# Altium PCB Teeth_Radiology3.0_PCB.PcbDoc
Units mm, origin at the board's own origin, x right, y up, seen from the top; angles counter-clockwise.
Board outline 151.26 x 111.25 mm, 2 copper layers (Top Layer, Bottom Layer); 88 components, 108 nets, 390 pads, 0 vias.
Unrouted connection lines stored in the file: 233.
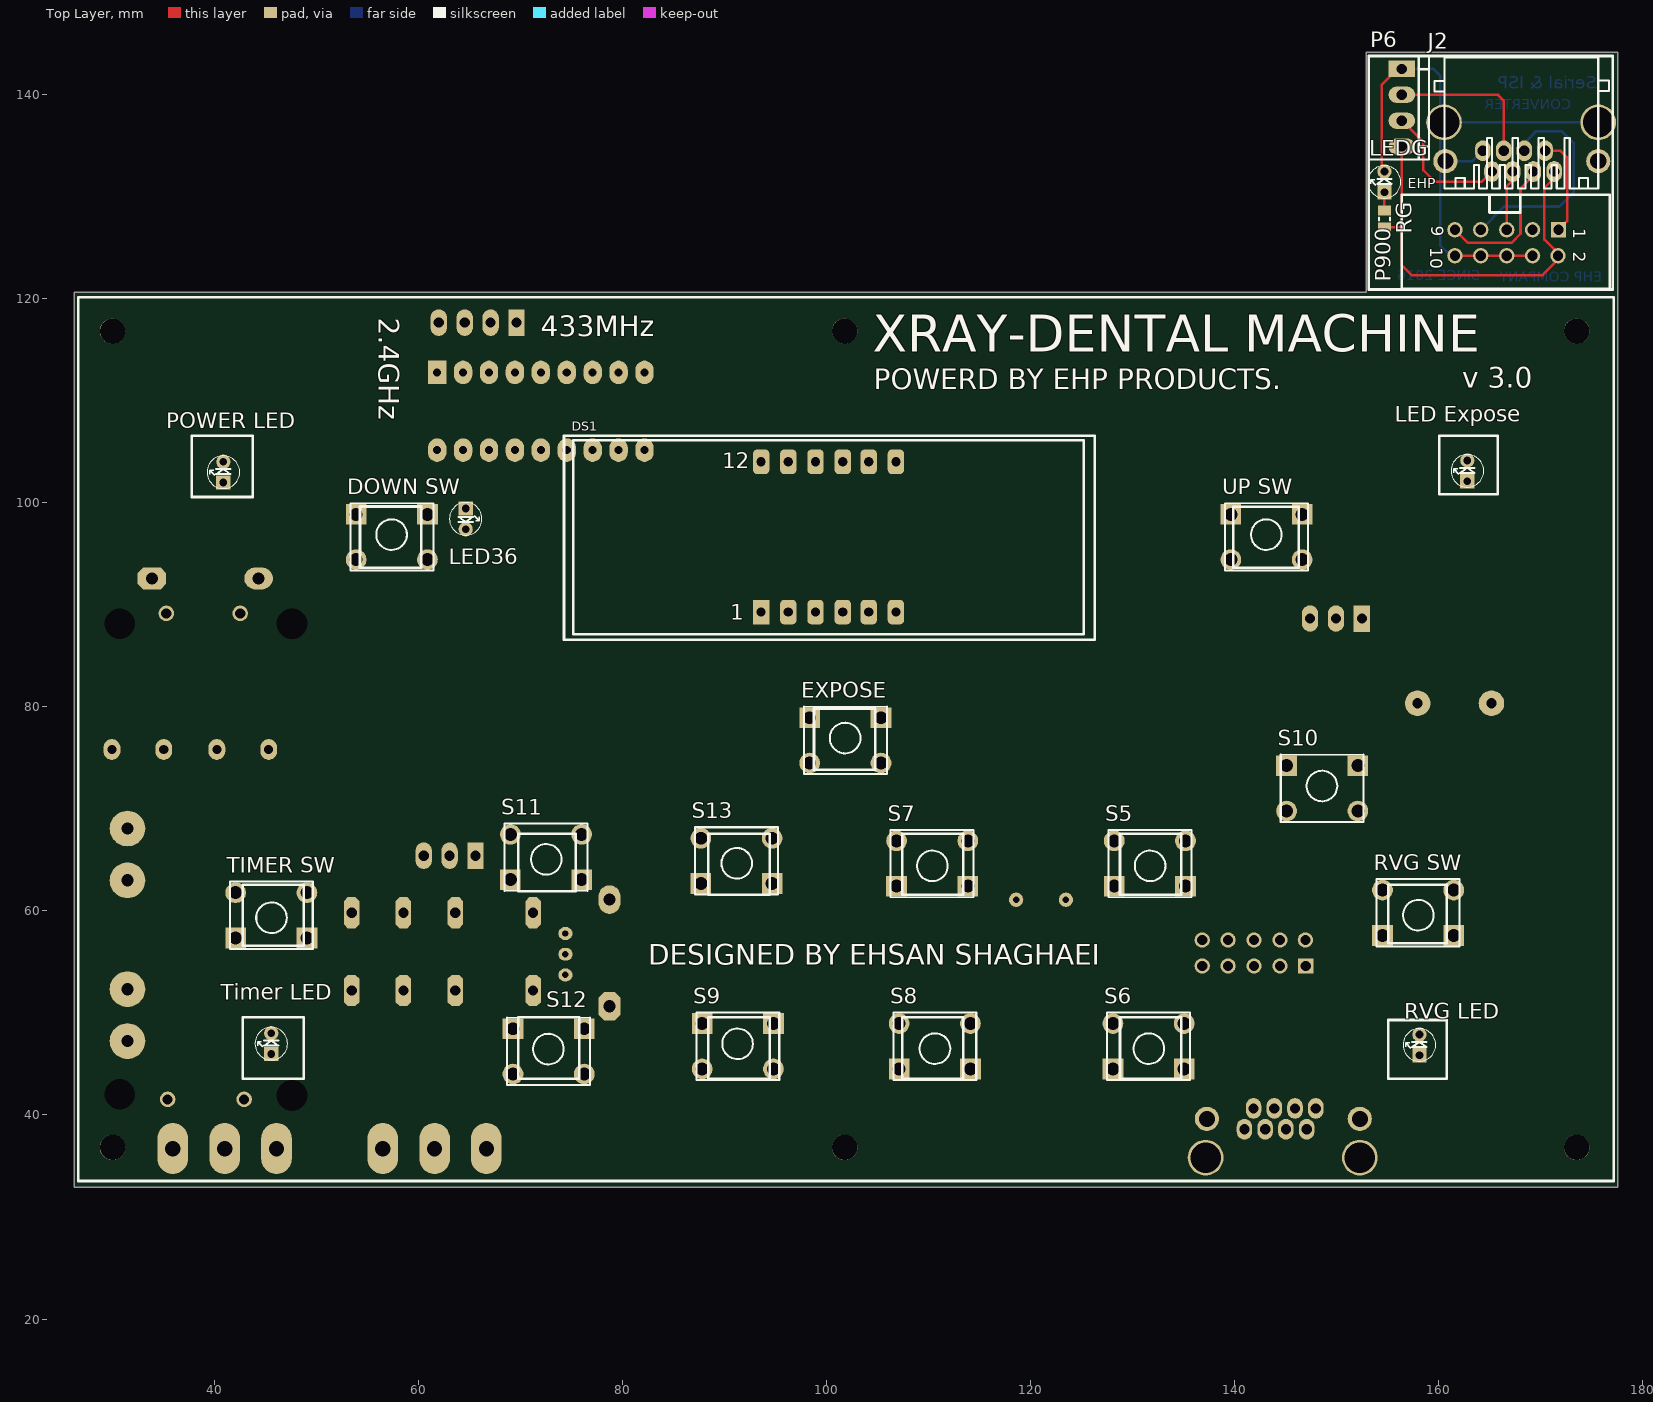
[diagram p0: Top Layer view]
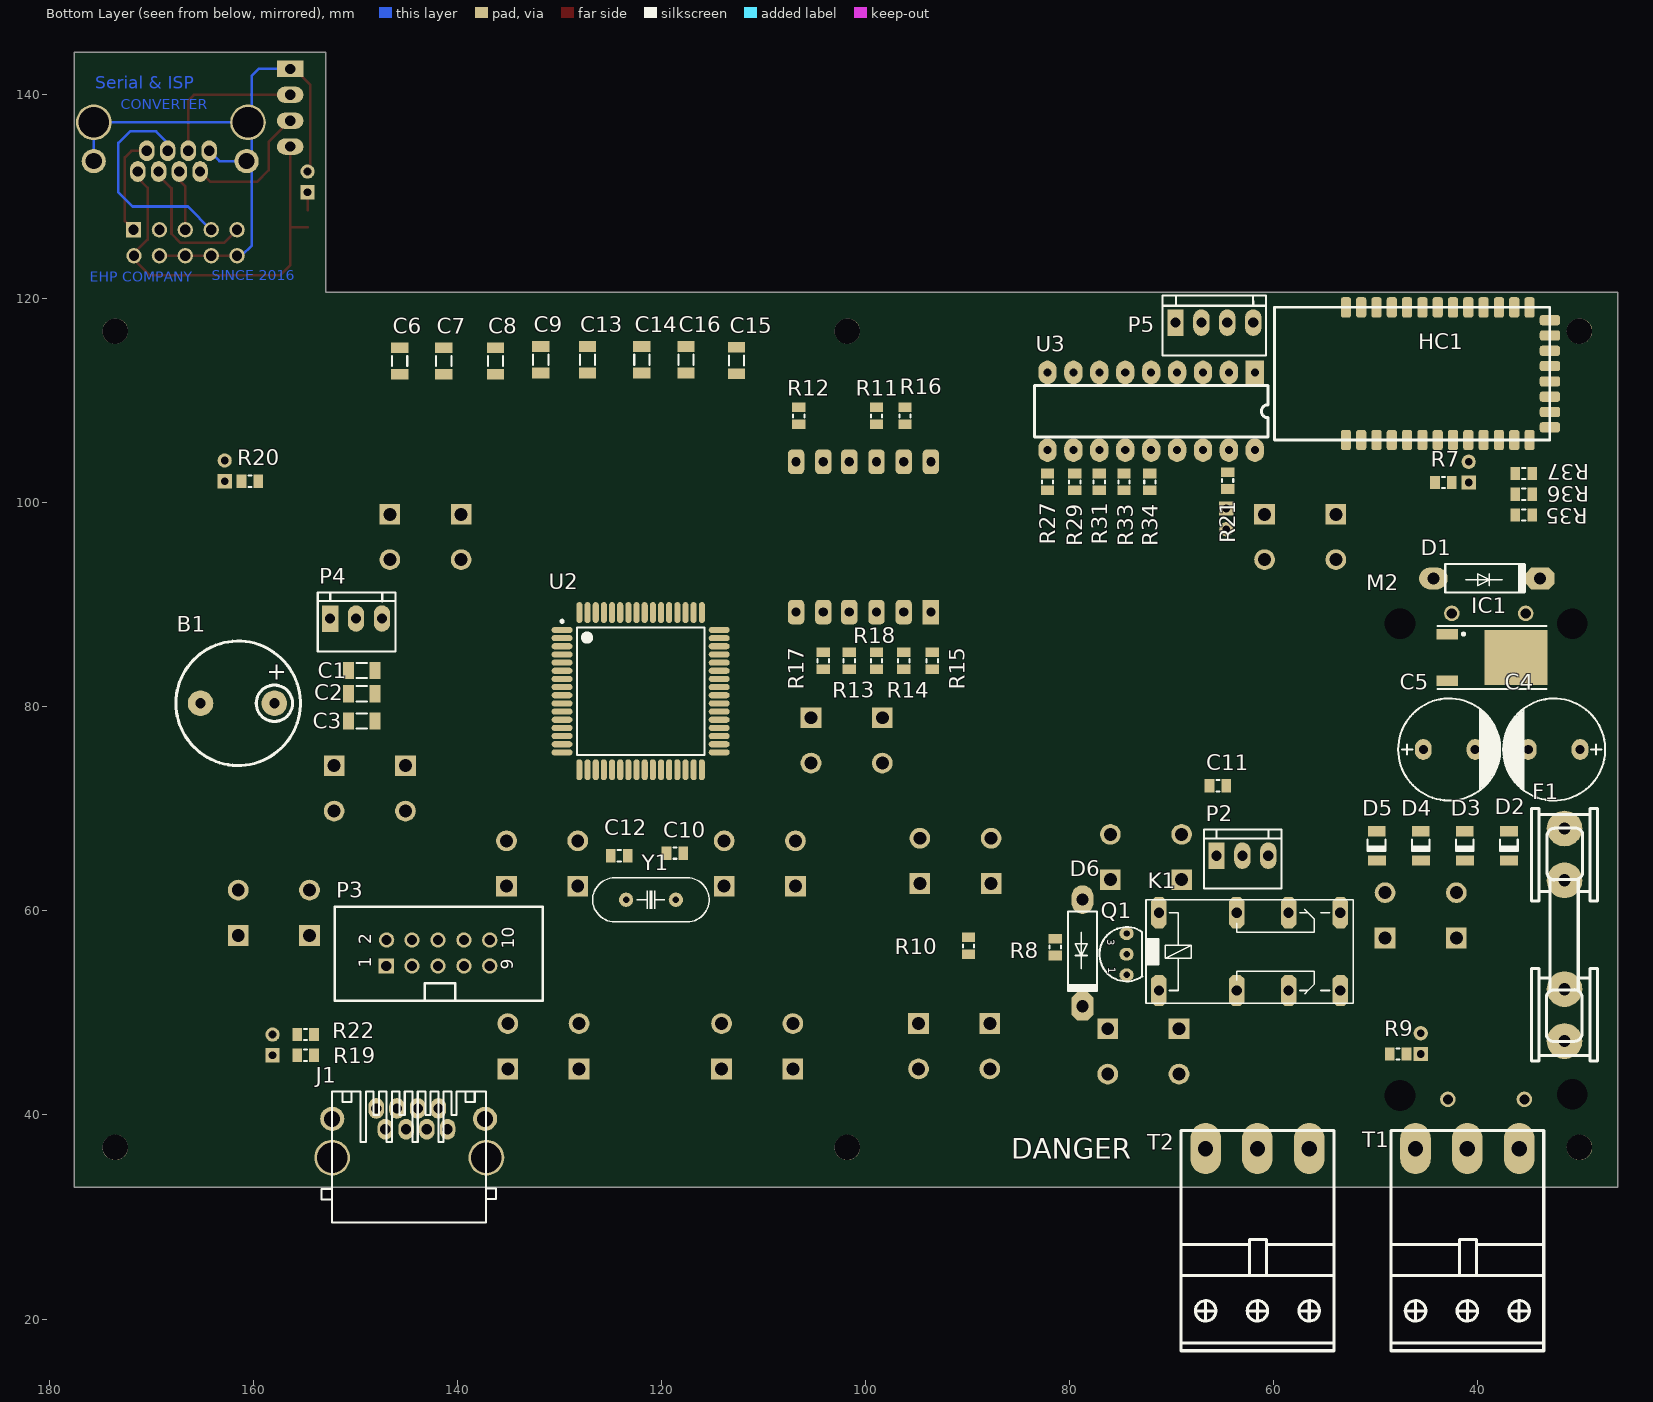
[diagram p1: Bottom Layer view, seen from below]

## Layer stack, top to bottom
Top Solder: solder mask 0.0102, Solder Resist, Dk 3.5
Top Layer: signal copper 0.0356
Dielectric 1: dielectric 0.32, FR-4, Dk 4.8
Bottom Layer: signal copper 0.0356
Bottom Solder: solder mask 0.0102, Solder Resist, Dk 3.5

## Board outline
26.289,32.893 177.546,32.893 177.546,144.145 152.908,144.145 152.908,120.65 26.289,120.65

## Design rules (kind name [scope] priority, off if disabled: settings)
Clearance [All] p1: gap=0.254
PolygonConnect [All] p1: connectstyle=Relief reliefconductorwidth=0.254 reliefentries=4 polygonreliefangle="90 Angle" airgapwidth=0.254
RoutingVias [All] p1: holewidth=0.711 width=1.27 viastyle="Through Hole" minholewidth=0.711 minwidth=1.27 maxholewidth=0.711 maxwidth=1.27
SolderMaskExpansion [All] p1: expansion=0.102
Width [All] p1: maxlimit=0.254 minlimit=0.254 preferedwidth=0.254
30 further rules are at their usual default settings.

## Components (designator, comment, footprint, x,y, rotation, side; value= is the part's Value field where it differs from the comment)
B1 "Buzzer" Buzzer 161.798,80.645 r180 bottom
C1 "10u" SMD_CAP_1206 148.082,83.566 r0 bottom
C2 "10u" SMD_CAP_1206 148.082,81.28 r0 bottom
C3 "100nF" SMD_CAP_1206 148.082,78.613 r0 bottom
C4 "1uF" "cap 04" 32.512,75.819 r180 bottom
C5 "1uF" "cap 04" 42.799,75.819 r0 bottom
C6 "10u" SMD_CAP_1206 145.669,115.189 r270 bottom
C7 "100nF" SMD_CAP_1206 141.351,115.189 r270 bottom
C8 "10u" SMD_CAP_1206 136.271,115.189 r270 bottom
C9 "100nF" SMD_CAP_1206 131.826,115.316 r270 bottom
C10 "18pF" SMD_CAP_0805 117.856,65.659 r0 bottom
C11 "100nF" SMD_CAP_0805 66.294,72.263 r180 bottom
C12 "18pF" SMD_CAP_0805 124.968,65.405 r180 bottom
C13 "10uF" SMD_CAP_1206 127.254,115.316 r270 bottom
C14 "10u" SMD_CAP_1206 121.92,115.316 r270 bottom
C15 "10u" SMD_CAP_1206 112.649,115.245 r270 bottom
C16 "100nF" SMD_CAP_1206 117.602,115.316 r270 bottom
D1 "1N4007" My_DO-41 33.665,92.837 r0 bottom
D2 "Diode Zener SMD" DIOMELF3615N 36.957,66.421 r90 bottom
D3 "Diode Zener SMD" DIOMELF3615N 41.275,66.421 r90 bottom
D4 "Diode Zener SMD" DIOMELF3615N 45.593,66.421 r90 bottom
D5 "Diode Zener SMD" DIOMELF3615N 49.911,66.421 r90 bottom
D6 "1N4007" My_DO-41 78.486,50.419 r90 bottom
"DOWN SW" "Switch PB" "Switch - Push to On" 57.404,96.647 r0 top
DS1 "7Segment-4Digit-CA" 7segCA 75.184,87.122 r0 top
EXPOSE "Switch PB" "Switch - Push to On" 101.854,76.708 r0 top
F1 "FUSE" FUSE_1 31.496,52.324 r90 bottom
HC1 "HC-05 Bluetooth" HC-05 42.926,112.649 r90 bottom
IC1 "L78M05" TO-252 39.624,84.836 r270 bottom
J1 "RJ45" My_RJ45 144.78,32.258 r180 bottom
J2 "RJ45" My_RJ45 168.148,140.843 r180 top
K1 "Relay-DPDT" My_REL_cochick 67.437,56.007 r180 bottom
LED36 "Red" LED-3mm 64.643,98.425 r270 top
"LED Expose" "Red" LED-3mm 162.814,103.124 r90 top
LEDG "Red" LED-3mm 154.686,131.445 r90 top
M2 "220-12 Medule" "AC-DC 220-12" 27.305,39.497 r90 bottom
P2 "LHWR" "Polarized Header 3" 63.119,65.532 r180 bottom
P3 "BoxHeader 2x5" "Box Header 2x5" 139.319,54.61 r90 bottom
P4 "LHWR" "Polarized Header 3" 149.987,88.773 r180 bottom
P5 "LHWR" "Polarized Header 4" 65.786,117.856 r180 bottom
P6 "LHWR" "Polarized Header 4" 156.591,138.684 r270 top
P900 "BoxHeader 2x5" "Box Header 2x5" 164.084,126.746 r270 top
"POWER LED" "Red" LED-3mm 40.894,102.997 r90 top
Q1 "C945" C945 74.422,55.753 r270 bottom
R7 "330" "RES 0805 (2012X06L)" 44.196,101.981 r180 bottom
R8 "1K" "RES 0805 (2012X06L)" 81.407,55.626 r90 bottom
R9 "330" "RES 0805 (2012X06L)" 48.641,45.974 r180 bottom
R10 "330" "RES 0805 (2012X06L)" 89.916,55.753 r90 bottom
R11 "330" "RES 0805 (2012X06L)" 96.139,107.696 r90 bottom
R12 "330" "RES 0805 (2012X06L)" 106.553,109.346 r270 bottom
R13 "330" "RES 0805 (2012X06L)" 101.6,83.693 r90 bottom
R14 "330" "RES 0805 (2012X06L)" 96.266,83.693 r90 bottom
R15 "330" "RES 0805 (2012X06L)" 93.472,83.693 r90 bottom
R16 "330" "RES 0805 (2012X06L)" 98.933,107.696 r90 bottom
R17 "330" "RES 0805 (2012X06L)" 104.14,83.693 r90 bottom
R18 "330" "RES 0805 (2012X06L)" 98.933,83.693 r90 bottom
R19 "10K" "RES 0805 (2012X06L)" 154.052,45.847 r0 bottom
R20 "330" "RES 0805 (2012X06L)" 159.512,102.108 r0 bottom
R21 "330" "RES 0805 (2012X06L)" 64.516,102.997 r270 bottom
R22 "330" "RES 0805 (2012X06L)" 154.051,47.879 r0 bottom
R27 "1K" "RES 0805 (2012X06L)" 82.169,102.87 r270 bottom
R29 "1K" "RES 0805 (2012X06L)" 79.502,102.87 r270 bottom
R31 "1K" "RES 0805 (2012X06L)" 77.089,102.87 r270 bottom
R33 "1K" "RES 0805 (2012X06L)" 74.676,102.87 r270 bottom
R34 "820k" "RES 0805 (2012X06L)" 72.136,101.219 r90 bottom
R35 "51k" "RES 0805 (2012X06L)" 36.322,98.806 r180 bottom
R36 "100k" "RES 0805 (2012X06L)" 34.671,100.838 r0 bottom
R37 "100k" "RES 0805 (2012X06L)" 34.671,102.87 r0 bottom
RG "330" "RES 0805 (2012X06L)" 154.686,127 r90 top
"RVG LED" "Red" LED-3mm 158.115,46.863 r90 top
"RVG SW" "Switch PB" "Switch - Push to On" 157.988,59.817 r180 top
S5 "Switch PB" "Switch - Push to On" 131.699,64.643 r180 top
S6 "Switch PB" "Switch - Push to On" 131.572,46.736 r180 top
S7 "Switch PB" "Switch - Push to On" 110.363,64.643 r180 top
S8 "Switch PB" "Switch - Push to On" 110.617,46.736 r180 top
S9 "Switch PB" "Switch - Push to On" 91.313,46.736 r0 top
S10 "Switch PB" "Switch - Push to On" 148.59,72.009 r0 top
S11 "Switch PB" "Switch - Push to On" 72.517,65.278 r180 top
S12 "Switch PB" "Switch - Push to On" 72.771,46.228 r0 top
S13 "Switch PB" "Switch - Push to On" 91.186,64.897 r180 top
T1 "PHONIX3" PHONIX3 35.941,36.703 r0 bottom
T2 "PHONIX3" PHONIX3 56.515,36.703 r0 bottom
"Timer LED" "Red" LED-3mm 45.593,46.99 r90 top (schematic designator Timer)
"TIMER SW" "Switch PB" "Switch - Push to On" 45.593,59.563 r180 top
U2 "ATmega64A-AU" 64A_M 122.047,81.534 r180 bottom
U3 "PT2272" DIP18 61.849,112.776 r270 bottom
"UP SW" "Switch PB" "Switch - Push to On" 143.129,96.647 r0 top
Y1 "16MHz" "XTAL Small" 121.031,61.087 r0 bottom

## Footprints (in the part's own frame and the unit in brackets; to place one, negate y for a bottom-side part, rotate by r counter-clockwise, add the part's x,y. Pads: shape width x height; smd on the part's side, far side on the other; paste and mask are expansions set on the pad)
7segCA [mm] "7seg-CA; 12 Leads"
  rect 1.6x2.4 hole 0.9: 1(18.415,2.159)
  rrect50% 1.6x2.4 hole 0.9: 2(21.082,2.159) 3(23.749,2.159) 4(26.416,2.159) 5(28.956,2.159) 6(31.623,2.159) 7(31.623,16.891) 8(28.956,16.891) 9(26.416,16.891) 10(23.749,16.891) 11(21.082,16.891) 12(18.415,16.891)
  silkscreen extent 0,0 50.04,19
64A_M [mm] "Thin QFP, 64-Leads, Body 14x14mm, Pitch 0.8mm, IPC Low Density"
  oval 2.05x0.6 smd: 1(-7.7,6) 2(-7.7,5.2) 3(-7.7,4.4) 4(-7.7,3.6) 5(-7.7,2.8) 6(-7.7,2) 7(-7.7,1.2) 8(-7.7,0.4) 9(-7.7,-0.4) 10(-7.7,-1.2) 11(-7.7,-2) 12(-7.7,-2.8) 13(-7.7,-3.6) 14(-7.7,-4.4) 15(-7.7,-5.2) 16(-7.7,-6) 33(7.7,-6) 34(7.7,-5.2) 35(7.7,-4.4) 36(7.7,-3.6) 37(7.7,-2.8) 38(7.7,-2) 39(7.7,-1.2) 40(7.7,-0.4) 41(7.7,0.4) 42(7.7,1.2) 43(7.7,2) 44(7.7,2.8) 45(7.7,3.6) 46(7.7,4.4) 47(7.7,5.2) 48(7.7,6)
  oval 0.6x2.05 smd: 17(-6,-7.7) 18(-5.2,-7.7) 19(-4.4,-7.7) 20(-3.6,-7.7) 21(-2.8,-7.7) 22(-2,-7.7) 23(-1.2,-7.7) 24(-0.4,-7.7) 25(0.4,-7.7) 26(1.2,-7.7) 27(2,-7.7) 28(2.8,-7.7) 29(3.6,-7.7) 30(4.4,-7.7) 31(5.2,-7.7) 32(6,-7.7) 49(6,7.7) 50(5.2,7.7) 51(4.4,7.7) 52(3.6,7.7) 53(2.8,7.7) 54(2,7.7) 55(1.2,7.7) 56(0.4,7.7) 57(-0.4,7.7) 58(-1.2,7.7) 59(-2,7.7) 60(-2.8,7.7) 61(-3.6,7.7) 62(-4.4,7.7) 63(-5.2,7.7) 64(-6,7.7)
  silkscreen extent -7.83,-6.25 6.25,6.97, body extent -7,-7 7,7, height 1.2
"AC-DC 220-12" [mil]
  round 60 hole 39.37: 0(1955,600) 1(1955,315) 2(80,615) 3(80,320)
  round 60 hole 118.11: 4(1915,135) 5(1915,800) 6(95,800) 7(100,135)
  body extent 6,-5 2014,940, height 118
"Box Header 2x5" [mm]
  rect 1.5x1.5 hole 1: 1(-0.006,7.666)
  round 1.5 hole 1: 2(2.54,7.62) 3(-0.006,5.126) 4(2.534,5.126) 5(-0.006,2.586) 6(2.534,2.586) 7(-0.006,0.046) 8(2.534,0.046) 9(-0.006,-2.494) 10(2.534,-2.494)
  silkscreen extent -3.42,-7.7 5.8,12.7, body extent -3.4,-7.7 5.7,12.66, height 9.43
Buzzer [mm] "Magnetic Transducer"
  round 2.5 hole 1: 1(3.859,-0.297) 2(-3.38,-0.297)
  silkscreen extent -5.8,-6.4 6.4,5.8, body extent -5.67,-6.39 6.17,5.45, height 6.98
C945 [mil] "NPN Transistor"
  oval 50x55 hole 25: 1(80,0) 2(0,0) 3(-80,0)
  silkscreen extent -105,-105 105,61, body extent -94,-96 95,58, height 315
"cap 04" [mil]
  oval 65x80 hole 35: 1(100,0) 2(-100,0)
  silkscreen extent -197,-197 197,197, body extent -198,-197 198,199, height 513
DIOMELF3615N [mm] "MELF Diode, 2-Leads, Body 3.6x1.5mm, IPC Medium Density"
  rect 1x1.75 smd: 1(-1.495,-0.03) 2(1.38,-0.005)
  silkscreen extent -0.55,-0.87 0.55,0.87, body extent -1.61,-0.83 1.54,0.67, height 1.45
DIP18 [mm]
  rect 2.3x1.8 hole 0.8: 1(0,0)
  oval 2.3x1.8 hole 0.8: 2(0,-2.54) 3(0,-5.08) 4(0,-7.62) 5(0,-10.16) 6(0,-12.7) 7(0,-15.24) 8(0,-17.78) 9(0,-20.32) 10(7.62,-20.32) 11(7.62,-17.78) 12(7.62,-15.24) 13(7.62,-12.7) 14(7.62,-10.16) 15(7.62,-7.62) 16(7.62,-5.08) 17(7.62,-2.54) 18(7.62,0)
  silkscreen extent 1.27,-21.59 6.35,1.27
FUSE_1 [mm]
  round 3.5 hole 1.2: 1(0,0) 2(10.668,0) ""(-5.08,0) ""(15.748,0)
  silkscreen extent -7.04,-3.25 17.7,3.25
HC-05 [mm]
  rrect50% 2x1 smd: 1(-6.5,10) 2(-6.5,8.5) 3(-6.5,7) 4(-6.5,5.5) 5(-6.5,4) 6(-6.5,2.5) 7(-6.5,1) 8(-6.5,-0.5) 9(-6.5,-2) 10(-6.5,-3.5) 11(-6.5,-5) 12(-6.5,-6.5) 13(-6.5,-8) 22(6.5,-8) 23(6.5,-6.5) 24(6.5,-5) 25(6.5,-3.5) 26(6.5,-2) 27(6.5,-0.5) 28(6.5,1) 29(6.5,2.5) 30(6.5,4) 31(6.5,5.5) 32(6.5,7) 33(6.5,8.5) 34(6.5,10)
  rrect50% 1x2 smd: 14(-5.254,-10) 15(-3.754,-10) 16(-2.254,-10) 17(-0.754,-10) 18(0.746,-10) 19(2.246,-10) 20(3.746,-10) 21(5.246,-10)
  silkscreen extent -6.5,-10 6.5,17, body extent -6.5,-9.77 6.5,17.13, height 2.5
LED-3mm [mil]
  rect 55x55 hole 30: 1(-40,0)
  round 55 hole 30: 2(40,0)
  silkscreen extent -63,-63 63,63, body extent -69,-69 69,69, height 154
My_DO-41 [mil]
  oval 110x85 hole 47.24: A(420.71,10)
  oct 110x85 hole 47.24: K(8.9,10)
  silkscreen extent 64,-45 375,65
My_REL_cochick [mil]
  oct 60x120 hole 40: 1(-150,-150) 2(-150,150) O1(350,-150) O2(350,150) P1(150,-150) P2(150,150) S1(550,-150) S2(550,150)
  silkscreen extent -200,-200 600,200
My_RJ45 [mil]
  oval 60x80 hole 40: 1(150,250) 2(115,330) 3(70,250) 4(35,330) 5(-10,250) 6(-45,330) 7(-90,250) 8(-125,330)
  round 137.8 hole 118.11 unplated: shild(-295,140) shild(300,140)
  round 92.99 hole 62.01: shild(-295,290) shild(295,290)
  silkscreen extent -336,-110 336,395
PHONIX3 [mm]
  oval 3x5 hole 1.5: 1(0,0) 2(5.08,0) 3(10.16,0)
  silkscreen extent -2.41,-1.78 12.57,19.81
"Polarized Header 3" [mm]
  rect 1.6x2.6 hole 1: 1(-2.49,-0.12)
  oval 1.6x2.6 hole 1: 2(0.05,-0.12) 3(2.59,-0.12)
  silkscreen extent -3.7,-3.35 3.9,2.42, body extent -3.72,-3.35 3.9,2.45, height 10.75
"Polarized Header 4" [mm]
  rect 1.6x2.6 hole 1: 1(-3.84,-0.2)
  oval 1.6x2.6 hole 1: 2(-1.3,-0.2) 3(1.24,-0.2) 4(3.78,-0.2)
  silkscreen extent -5.1,-3.42 5.05,2.45, body extent -5.06,-3.43 5.1,2.37, height 10.75
"RES 0805 (2012X06L)" [mm] "Chip Resistor, 2-Leads, Body 2.0x1.3mm, IPC High Density _ (0.100 W)"
  rect 0.95x1.3 smd: 1(0,0) 2(1.65,0)
  silkscreen extent 0.67,-0.55 0.97,0.55, body extent -0.19,-0.63 1.84,0.64, height 0.6
SMD_CAP_0805 [mm]
  rect 0.95x1.3 smd: 1(0,0) 2(1.65,0)
  silkscreen extent 0.67,-0.55 0.97,0.55, body extent -0.19,-0.64 1.84,0.63, height 0.65
SMD_CAP_1206 [mm]
  rect 1.05x1.7 smd: 1(0,0) 2(2.596,0)
  silkscreen extent 0.8,-0.75 1.8,0.75, body extent -0.22,-0.77 2.82,0.75, height 0.75
"Switch - Push to On" [mil]
  rect 80x80 hole 50: 1(-137.5,87.5) 1(137.5,87.5)
  round 80 hole 50: 2(-137.5,-87.5) 2(137.5,-87.5)
  silkscreen extent -160,-130 160,130, body extent -155,-121 157,123, height 205
TO-252 [mm] "D-PAK/TO-252-AA; 3 Leads (1 Cropped); Body 10.1 (inc. leads) x 6.6 mm (LxW max)"
  rect 1x2.1 smd: 1(-2.285,-3.375) 3(2.285,-3.375)
  rect 5.4x6.2 smd: 4(0,3.375)
  silkscreen extent -3.08,-4.32 3.09,6.38, body extent -3.27,-4.11 3.27,5.83, height 2.39
"XTAL Small" [mil]
  round 55 hole 25: 1(-96.06,0) 2(96.06,0)
  silkscreen extent -225,-85 225,85, body extent -226,-89 226,89, height 140

## Part data
C1 C2 C3 C6 C7 C8 C9 C10 C11 C12 C13 C14 C15 C16: library part Cap-Bipolar, "Bipolar Capacitor"
C4 C5: library part Cap-Polar, "Polar Capacitor"
D1 D6: "1 Amp Diode"
"DOWN SW" EXPOSE "RVG SW" S5 S6 S7 S8 S9 S10 S11 S12 S13 "TIMER SW" "UP SW": "Push Button Switch"
DS1: library part 7Seg-4Digit-CA, "7-Segment Display: CA"
IC1: "Precision 500mA Regulator"
J1 J2: "Right Angle, Standard Profile, RJ45-Keyed, Flange Mount PCB Jack"
K1: "Dual-Pole Dual-Throw Relay"
LED36 "LED Expose" LEDG "POWER LED" "RVG LED" "Timer LED": library part LED, "LED"
P2 P4: library part "3pin LHWR"
P5 P6: library part "4pin LHWR"
Q1: "NPN Transistor"
R7 R8 R9 R10 R11 R12 R13 R14 R15 R16 R17 R18 R19 R20 R21 R22 R27 R29 R31 R33 R34 R35 R36 R37 RG: library part Resistor, "Resistor"
U2: "8-bit AVR Microcontroller, 64KB Flash, 2KB EEPROM, 4KB SRAM, 64-pin TQFP, Industrial Grade (-40°C to 85°C)"
Y1: library part XTAL, "XTAL Crystal"

## Free pads (board coordinates)
  round 2.5 hole 2.5: 1(30.032,36.818) 1(30.032,116.818) 1(101.782,36.818) 1(101.782,116.818) 1(173.532,36.818) 1(173.532,116.818)

## Nets (pads, with @x,y where several pads share a name; then routed paths per layer and width w, separated by ;. In a path a pad name is that pad's centre, name@x,y a point inside that pad or via, vN(x,y) a via of type N, cw(c..) or ccw(c..) an arc to the next point about the centre after c; other vN are vias at no path point)
+12: C4.1 C6.1 C7.1 D1.K IC1.1 P2.1 R8.2
A0: U2.51 U3.1
A1: U2.50 U3.2
A2: U2.49 U3.3
A3: U2.48 U3.4
A4: U2.47 U3.5
A5: U2.46 U3.6
A6: U2.45 U3.7
A7: U2.44 U3.8
AS: HC1.24 HC1.31 U2.5
D0: R33.1 U2.32 U3.13
D1: R31.1 U2.31 U3.12
D2: R29.1 U2.30 U3.11
D3: R27.1 U2.29 U3.10
EARTH: T1.2 T2.2
GND: "DOWN SW.2" "LED Expose.2" "POWER LED.2" "RVG SW.1" "Timer LED.2" "TIMER SW.1" "UP SW.1" B1.2 C1.2 C2.2 C3.2 C4.2 C5.2 C6.2 C7.2 C8.2 C9.2 C10.1 C11.1 C12.1 C13.2 C14.2 C15.2 C16.2 D2.2 D3.2 D4.2 D5.2 D6.A EXPOSE.2 HC1.13 HC1.21 HC1.22 IC1.4 J1.1 J1.shild LED36.2 M2.1 P3.4 P3.6 P3.8 P3.10 P4.1 P5.1 Q1.1 R22.1 R27.2 R29.2 R31.2 R33.2 R36.1 R37.1 S5.1 S6.2 S7.1 S8.2 S9.1 S10.2 S11.1 S12.1 S13.1 U2.22 U2.53 U2.63 U3.9
KEY: HC1.34 U2.4
L: F1.1 K1.S1 T1.1
MISO: HC1.2 J1.2 J1.6 P3.9 U2.3
MOSI: HC1.1 J1.3 J1.7 P3.1 U2.2
N: K1.S2 M2.3 T1.3
NetB1_1: B1.1 U2.10
NetC12_2: C12.2 U2.23 Y1.2
NetD1_A: D1.A M2.0
NetD6_K: D6.K K1.1 Q1.2 R8.1
"NetDOWN SW_1": "DOWN SW.1" U2.25
NetDS1_1: DS1.1 R15.2
NetDS1_2: DS1.2 R14.2
NetDS1_3: DS1.3 R18.2
NetDS1_4: DS1.4 R13.2
NetDS1_5: DS1.5 R17.2
NetDS1_6: DS1.6 U2.18
NetDS1_7: DS1.7 R12.2
NetDS1_8: DS1.8 U2.43
NetDS1_9: DS1.9 U2.34
NetDS1_10: DS1.10 R16.2
NetDS1_11: DS1.11 R11.2
NetDS1_12: DS1.12 U2.33
NetEXPOSE_1: EXPOSE.1 U2.27
NetF1_2: F1.2 M2.2
NetHC1_12: HC1.12 R35.1 R36.2 R37.2
NetJ2_1: J2.1 J2.shild LEDG.2 P6.1 P900.4 P900.6 P900.8 P900.10 | length 65.4
  Top Layer w0.254: LEDG.2 154.432,132.715 154.432,140.97 155.986,142.524 P6.1 ; J2.shild@160.147,132.969 J2.shild@160.655,133.477 ; P900.10@161.157,124.212 P900.10 P900.8 P900.6 P900.4
  Bottom Layer w0.254: P6.1 159.482,142.524 160.147,141.859 J2.shild@160.147,136.906 ; J2.shild@160.147,132.969 160.147,125.222 P900.10@161.157,124.212 ; J2.1 163.322,133.477 160.655,133.477 160.147,133.985 J2.shild@160.147,136.906 ; J2.shild@175.641,133.477 175.641,137.287 160.528,137.287 J2.shild@160.147,136.906
NetJ2_2: J2.2 P6.3 | length 13.4
  Top Layer w0.254: P6.3 158.496,135.339 158.496,132.588 159.639,131.445 164.211,131.445 J2.2
NetJ2_3: J2.3 P6.2 | length 15.2
  Top Layer w0.254: P6.2 165.832,139.984 166.37,139.446 J2.3
NetJ2_4: J2.4 P900.5 | length 6
  Top Layer w0.254: P900.5 166.67,130.983 167.259,131.572 J2.4
NetJ2_5: J2.5 P900.7 | length 22
  Bottom Layer w0.254: P900.7 166.41,129.032 171.831,129.032 173.228,130.429 173.228,135.255 172.085,136.398 169.545,136.398 168.402,135.255 J2.5
NetJ2_6: J2.6 P900.9 | length 13.9
  Top Layer w0.254: P900.9 162.866,125.476 167.132,125.476 168.021,126.365 168.021,130.81 169.291,132.08 J2.6
NetJ2_7: J2.7 P900.1 | length 9.9
  Top Layer w0.254: J2.7 171.958,134.493 172.593,133.858 172.593,127.595 P900.1
NetJ2_8: J2.8 P6.4 P900.2 RG.1 | length 39.5
  Top Layer w0.254: RG.1 156.391,127 ; P6.4 156.391,127 ; J2.8@171.577,132.461 J2.8 171.323,131.826 170.37,130.874 170.37,125.793 171.704,124.46 P900.2 171.704,123.825 170.18,122.301 157.353,122.301 156.391,123.263 156.391,127
NetJS1_2: 
NetJS2_2: 
NetJS3_2: 
NetJS4_2: 
NetJS5_2: 
NetJS6_2: 
NetJS7_2: 
NetJS8_2: 
NetK1_2: K1.2 P2.2
NetK1_P1: K1.P1 T2.3
NetK1_P2: K1.P2 T2.1
NetLED36_1: LED36.1 R21.2
"NetLED Expose_1": "LED Expose.1" R20.2
NetLEDG_1: LEDG.1 RG.2 | length 1.8
  Top Layer w0.254: RG.2 LEDG.1
NetM1_2: 
NetP1_1: 
NetP5_3: P5.3 U3.14
"NetPOWER LED_1": "POWER LED.1" R7.2
NetQ1_3: Q1.3 R10.2
NetR1_1: 
NetR1_2: 
NetR3_2: 
NetR4_2: 
NetR5_2: 
NetR6_2: 
NetR9_2: "Timer LED.1" R9.2
NetR10_1: R10.1 U2.12
NetR11_1: R11.1 U2.54
NetR12_1: R12.1 U2.55
NetR13_1: R13.1 U2.56
NetR14_1: R14.1 U2.57
NetR15_1: R15.1 U2.58
NetR16_1: R16.1 U2.59
NetR17_1: R17.1 U2.60
NetR18_1: R18.1 U2.61
NetR20_1: R20.1 U2.19
NetR21_1: R21.1 U3.17
NetR22_2: "RVG LED.2" R22.2
NetR34_1: R34.1 U3.16
NetR34_2: R34.2 U3.15
"NetRVG LED_1": "RVG LED.1" U2.35
"NetRVG SW_2": "RVG SW.2" U2.8
NetS5_2: S5.2 U2.38
NetS6_1: S6.1 U2.26
NetS7_2: S7.2 U2.39
NetS8_1: S8.1 U2.28
NetS9_2: S9.2 U2.40
NetS11_2: S11.2 U2.7
NetS12_2: S12.2 U2.41
NetS13_2: S13.2 U2.42
"NetTIMER SW_2": "TIMER SW.2" U2.9
NetU2_6: "UP SW.2" U2.6
PEN: P4.2 U2.1
RGND: 
RST: HC1.11 J1.4 P3.5 R19.2 S10.1 U2.20
RVCC: 
SCK: J1.5 P3.7 R9.1 U2.11
VCC: C1.1 C2.1 C3.1 C5.1 C8.1 C9.1 C11.2 C13.1 C14.1 C15.1 C16.1 D2.1 D3.1 D4.1 D5.1 IC1.3 J1.8 P2.3 P3.2 P4.3 P5.4 R7.1 R19.1 R35.2 U2.21 U2.52 U2.62 U2.64 U3.18
XTAL: C10.2 P3.3 U2.24 Y1.1
pads on no net: F1. HC1.3 HC1.4 HC1.5 HC1.6 HC1.7 HC1.8 HC1.9 HC1.10 HC1.14 HC1.15 HC1.16 HC1.17 HC1.18 HC1.19 HC1.20 HC1.23 HC1.25 HC1.26 HC1.27 HC1.28 HC1.29 HC1.30 HC1.32 HC1.33 K1.O1 K1.O2 M2.4 M2.5 M2.6 M2.7 P5.2 P900.3 U2.13 U2.14 U2.15 U2.16 U2.17 U2.36 U2.37

## Other copper
Bottom Layer:
  text "Serial & ISP" at 175.514,140.589 h1.2
  text "CONVERTER" at 172.974,138.557 h1
  text "SINCE 2016" at 164.084,121.793 h1
  text "EHP COMPANY" at 176.022,121.666 h1

## Silkscreen, mask and mechanical layers (free items; w line width, h text height)
Top Overlay:
  lines w0.254: 69.782,49.022 69.782,49.568 75.782,49.568 75.782,43.568 69.782,43.568 69.782,49.373 ; 153.166,120.904 153.166,143.784 177.058,143.784 177.058,121.011 ; 153.293,120.904 177.058,120.904 ; 26.67,33.528 26.67,120.142 177.165,120.142 177.165,33.528 26.67,33.528 ; 37.782,100.568 43.782,100.568 43.782,106.568 37.782,106.568 37.782,100.568 ; 42.782,43.568 48.782,43.568 48.782,49.568 42.782,49.568 42.782,43.568 ; 42.782,56.568 42.782,62.568 48.782,62.568 48.782,56.568 42.782,56.568 ; 54.282,93.632 60.282,93.632 60.282,99.632 54.282,99.632 54.282,93.632 ; 69.782,61.925 69.782,67.568 75.425,67.568 75.425,61.925 69.782,61.925 ; 74.282,86.568 74.282,106.568 126.282,106.568 126.282,86.568 74.282,86.568 ; 88.425,43.568 94.425,43.568 94.425,49.568 88.425,49.568 88.425,43.568 ; 88.425,61.568 94.425,61.568 94.425,67.568 88.425,67.568 88.425,61.568 ; 98.782,73.818 104.782,73.818 104.782,79.818 98.782,79.818 98.782,73.818 ; 107.425,43.568 113.425,43.568 113.425,49.568 107.425,49.568 107.425,43.568 ; 107.425,61.568 107.425,67.568 113.425,67.568 113.425,61.568 107.425,61.568 ; 128.77,43.568 134.77,43.568 134.77,49.568 128.77,49.568 128.77,43.568 ; 128.77,61.568 134.77,61.568 134.77,67.568 128.77,67.568 128.77,61.568 ; 139.855,93.62 146.282,93.62 146.282,99.62 139.855,99.62 139.855,93.62 ; 155.043,43.568 160.782,43.568 160.782,49.308 155.043,49.308 155.043,43.568 ; 155.043,56.829 160.782,56.829 160.782,62.568 155.043,62.568 155.043,56.829 ; 160.043,100.829 165.782,100.829 165.782,106.568 160.043,106.568 160.043,100.829
  text "EHP" at 156.972,130.81 h1
  text "2.4GHz" at 56.134,118.11 h2 r270
  text "433MHz" at 72.009,116.332 h2
  text "XRAY-DENTAL MACHINE" at 104.521,114.808 h3.6
  text "v 3.0" at 162.306,111.252 h2
  text "POWERD BY EHP PRODUCTS." at 104.648,111.125 h2
  text "DESIGNED BY EHSAN SHAGHAEI" at 82.55,54.737 h2
Bottom Overlay:
  text "DANGER" at 85.725,35.687 h2
Mechanical 1:
  lines w0.254: 152.781,120.65 152.781,144.272 177.546,144.272 177.546,120.523 ; 177.546,120.523 177.546,33.02 26.289,33.02 26.289,120.523 177.546,120.523

## Text inside footprints (layer, text, board x,y; h text height)
B1: Bottom Overlay "+" at 158.701,82.634 h1.7
DS1: Top Overlay "12" at 89.789,103.378 h1.52; Top Overlay "1" at 90.551,88.519 h1.52
P3: Bottom Overlay "10" at 134.419,56.31 h1.2 r270; Bottom Overlay "9" at 134.519,54.21 h1.2 r270; Bottom Overlay "2" at 148.445,56.744 h1.2 r270; Bottom Overlay "1" at 148.445,54.444 h1.2 r270
P900: Top Overlay "10" at 159.184,125.046 h1.2 r270; Top Overlay "9" at 159.284,127.146 h1.2 r270; Top Overlay "2" at 173.21,124.612 h1.2 r270; Top Overlay "1" at 173.21,126.912 h1.2 r270
Q1: Bottom Overlay "1" at 76.232,54.458 h0.7 r90; Bottom Overlay "3" at 76.327,57.226 h0.7 r90